# Altium PCB SignalAnalyse.PcbDoc (part 3 of 3)
Units mil, origin at the board's own origin, x right, y up, seen from the top; angles counter-clockwise.
Board outline 4204.03 x 1800 mil, 2 copper layers (Top Layer, Bottom Layer); 94 components, 52 nets, 372 pads, 56 vias.
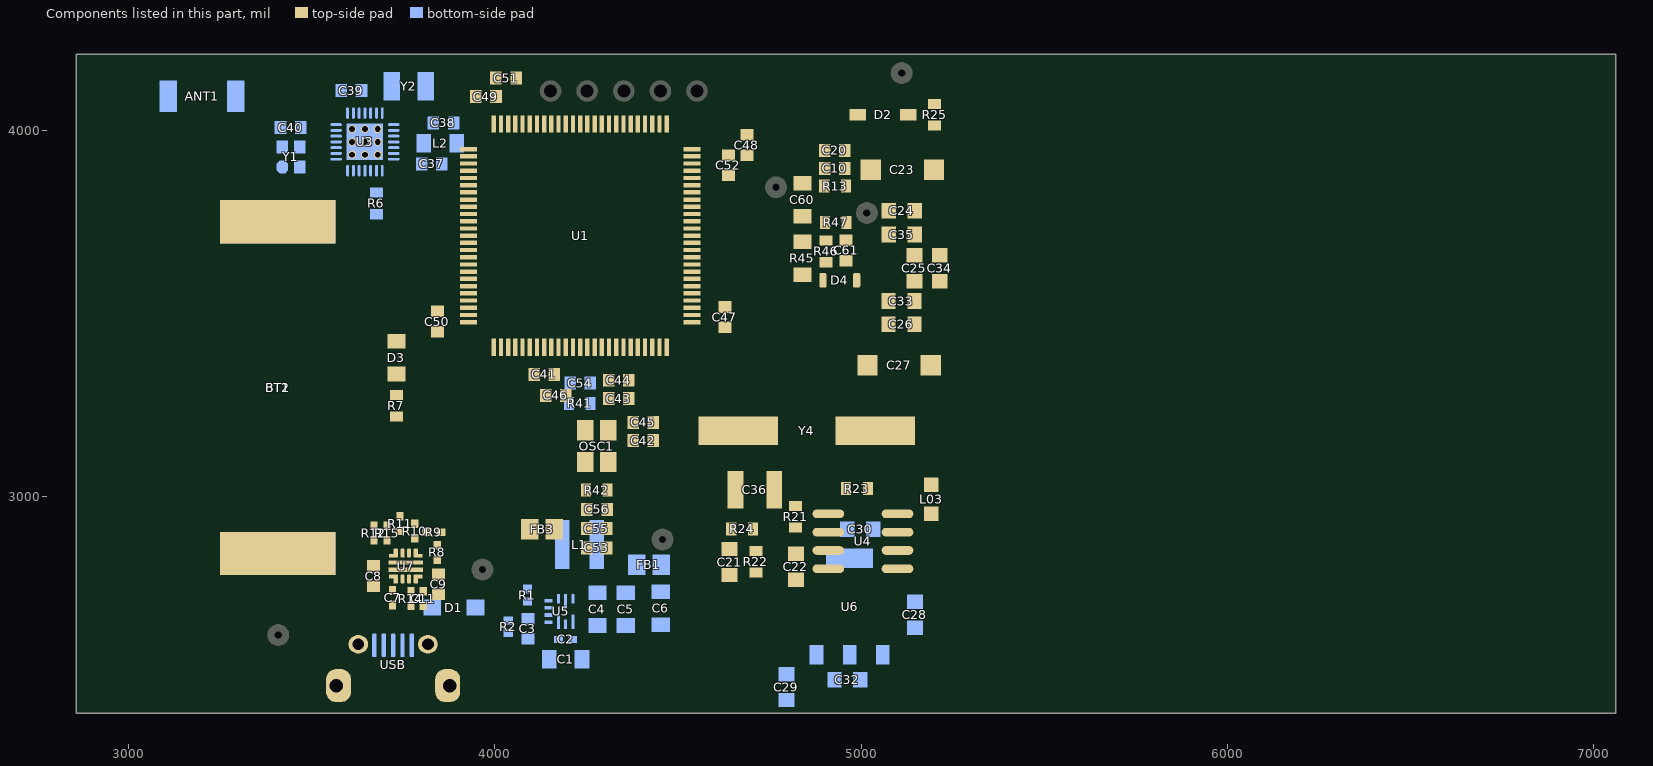
[diagram p2: the components of this part, seen from the top]

## Polygon pours and split planes (outlines as drawn) (continued)
no net on Top Layer "Top Layer-NetR23_1" (solid, pour order 92): 4907,3049
NetC22_2 on Top Layer "Top Layer-NetC22_2" (solid, pour order 90): 4854,2840 ccw(c4854,2830) 4844,2830 4844,2825 cw(c4841,2825) 4841,2822 4804,2822 cw(c4804,2827) 4799,2827 4799,2860 cw(c4803,2860) 4803,2864 4945.86,2864 ccw(c4945.86,2898.14) 4970,2874 ccw(c4950.69,2893.31) 4978,2893.31 4978,2953 ccw(c4944.2,2953) 4968.1,2976.9 4960,2985 ccw(c4947.93,2972.93) 4947.93,2990 4940,2990 cw(c4940,2999) 4931,2999 4931,3042 cw(c4934,3042) 4934,3045 4969,3045 cw(c4969,3033) 4981,3033 4981,3016 ccw(c5038.94,3016) 4997.97,2975.03 4998,2975 cw(c4971.44,2948.44) 5009,2948.44 5009,2881.97 cw(c4968.03,2881.97) 4997,2853 cw(c4965.62,2884.38) 4965.62,2840
NetR23_2 on Top Layer "Top Layer-NetR23_1 1" (solid, pour order 88): 5045,3126 cw(c5057,3126) 5057,3138 5143,3138 ccw(c5143,3147) 5152,3147 5152,3211 ccw(c5142,3211) 5142,3221 4937,3221 ccw(c4937,3211) 4927,3211 4927,3148 ccw(c4940,3148) 4940,3135 4995,3135 cw(c4995,3126) 5004,3126 5004,3005.66 ccw(c5031.31,3005.66) 5012,2986.34 cw(c4980.62,2954.96) 5025,2954.96 5025,2902.34 ccw(c5037,2902.34) 5037,2890.34 5080,2890.34 ccw(c5080,2898.34) 5088,2898.34 5088,2908.34 ccw(c5082,2908.34) 5082,2914.34 5061,2914.34 5058.66,2914.34 cw(c5058.66,2928) 5045,2928
no net on Top Layer "Top Layer-No Net 1" (solid, pour order 84): 5083,3597
GND on Top Layer "GND_L01_P024" (solid, remove dead copper, pour order 24): 4634,2568 ccw(c4634,2580) 4646,2580 4646,2639 ccw(c4630,2639) 4630,2655 4407,2655 cw(c4407,2667) 4395,2667 4395,3216 ccw(c4389,3216) 4389,3222 4332,3222 cw(c4332,3227) 4327,3227 4327,3334 ccw(c4322,3334) 4322,3339 4290,3339 ccw(c4290,3335) 4286,3335 4286,3155 ccw(c4291,3155) 4291,3150 4356,3150 cw(c4356,3145) 4361,3145 4361,2989 cw(c4355,2989) 4355,2983 4292,2983 ccw(c4292,2980) 4289,2980 4289,2782 cw(c4271,2782) 4271,2764 4066,2764 cw(c4066,2775) 4055,2775 4041,2775 4041,2725.42 ccw(c4141,2725.42) 4070.29,2654.71 4127.71,2597.29 ccw(c4198.42,2668) 4198.42,2568
3.3V on Top Layer "3.3V_L01_P072" (solid, remove dead copper, pour order 72): 4706,3971 4579,3971 ccw(c4579,3954) 4562,3954 4562,3943 cw(c4561,3943) 4561,3942 4495,3942 ccw(c4495,3936) 4489,3936 cw(c4481,3936) 4481,3928 4473,3928 cw(c4473,3943) 4458,3943 4458,3957 cw(c4470,3957) 4470,3969 4506,3969 ccw(c4506,3983) 4520,3983 cw(c4540,3983) 4540,4003 4706,4003
NetC51_2 on Top Layer "NETC51_2_L01_P010" (solid, remove dead copper, pour order 10): 4030,3992 4040,3992 ccw(c4040,3994) 4042,3994 4042,4121 cw(c4045,4121) 4045,4124 4074,4124 ccw(c4074,4125) 4075,4125 4075,4160 ccw(c4073,4160) 4073,4162 4030,4162
3.3V on Top Layer "3.3V_L01_P018" (solid, pour order 18): 4284,3122
3.3V on Top Layer "3.3V_L01_P016" (solid, pour order 16): 4284,3122
no net on Top Layer "Top Layer-No Net" (solid, pour order 0): 4557,3206
Vcc_un on Bottom Layer "Bottom Layer-Vcc_un_RF" (solid, pour order 110): 4902,2663.27 ccw(c4871.27,2663.27) 4893,2685 ccw(c4861.62,2653.62) 4861.62,2698 4704,2698 ccw(c4704,2682) 4688,2682 4688,2506 ccw(c4707,2506) 4707,2487 4898.41,2487 cw(c4898.5,2482.35) 4903.15,2482.44 ccw(c4911,2484) 4911,2476 4944,2476 ccw(c4944,2483) 4951,2483 4951,2514 ccw(c4940,2514) 4940,2525 4921,2525 cw(c4921,2544) 4902,2544
Vcc_un on Bottom Layer "VCC_UN_L02_P204" (solid, pour order 204): 3994.69,2771.69 ccw(c4039.8,2726.57) 3976,2726.57 3976,2591.38 cw(c3931.62,2591.38) 3963,2560 3933,2560 3925.29,2567.71 cw(c3996,2638.42) 3896,2638.42 3896,2744 ccw(c3856,2744) 3856,2784 3777.94,2784 cw(c3777.94,2865.94) 3720,2808 3683.29,2844.71 cw(c3754,2915.42) 3654,2915.42 3654,2966 cw(c3670,2966) 3670,2982 3672,2982 cw(c3672,2967) 3687,2967 3687,2922.42 ccw(c3787,2922.42) 3716.29,2851.71 ccw(c3766.29,2901.71) 3766.29,2831 3974,2831 cw(c3974,2799) 4006,2799 cw(c3967.38,2799)
GND on Bottom Layer "Bottom Layer-GND 3" (solid, pour order 186): 3625,4194 3352,4194 ccw(c3352,4190) 3348,4190 3348,4150 ccw(c3355,4150) 3355,4143 3423.58,4143 cw(c3423.58,4043) 3494.29,4113.71 3581,4027 3586,4032 3571.75,4046.25 cw(c3631.5,4106) 3547,4106 3547,4168 cw(c3557,4168) 3557,4178 3601,4178 cw(c3601,4170) 3609,4170 3609,4164 ccw(c3617.71,4163.16) 3625,4168
GND on Bottom Layer "Bottom Layer-GND 5" (solid, pour order 184): 3358,3880 cw(c3358,3890) 3348,3890 3348,4034 cw(c3352,4034) 3352,4038 3409.69,4038 cw(c3409.69,4010.69) 3429,4030 cw(c3416.93,4017.93) 3434,4017.93 3434,3994 cw(c3425,3994) 3425,3985 3391,3985 ccw(c3391,3978) 3384,3978 3384,3889 cw(c3375,3889) 3375,3880
GND on Bottom Layer "Bottom Layer-GND 4" (solid, pour order 180): 4177.97,4065.97 4162.14,4050.14 ccw(c4196.28,4016) 4148,4016 4148,3299 ccw(c4157,3299) 4157,3290 4224,3290 4224,3853.79 ccw(c4172.79,3853.79) 4209,3890 cw(c4252.46,3933.46) 4191.3,3927.43 4191.3,3972.99 cw(c4221.01,3972.99) 4200,3994 ccw(c4173.44,4020.56) 4211,4020.56 4211,4106.5 ccw(c4208,4106.5) 4208,4109.5 4196,4109.5 cw(c4134.44,4109.5)
BT_RXD on Bottom Layer "Bottom Layer-BT_RXD" (solid, pour order 176): 3556,3853 cw(c3556,3862) 3547,3862 3547,3920 cw(c3552.4,3920) 3552.4,3925.4 3577.4,3925.4 cw(c3577.4,3921.47) 3577.72,3925.39 cw(c3577.72,3921.11) 3582,3921.11 3582,3861 cw(c3574,3861) 3574,3853
BT_TXD on Bottom Layer "Bottom Layer-BT_TXD" (solid, pour order 178): 3591,3880 3591,3842 cw(c3585,3842) 3585,3836 ccw(c3585,3827) 3576,3827 3576,3819 ccw(c3583,3819) 3583,3812 3594,3812 ccw(c3594,3820) 3602,3820 3602,3901 ccw(c3598,3901) 3598,3905 3595,3905 ccw(c3595,3901) 3591,3901
3.3V on Bottom Layer "Bottom Layer-3.3V 1" (solid, pour order 158): 3780,3704.5 3780,3435 cw(c3749,3435) 3749,3404 3732,3404 cw(c3732,3439) 3697,3439 3697,3715 3697,3779 ccw(c3691,3779) 3691,3785 3662,3785 ccw(c3662,3778) 3655,3778 3655,3393 ccw(c3693,3393) 3693,3355 3756,3355 cw(c3756,3331) 3780,3331 3780,3227 ccw(c3813,3227) 3813,3194 4029,3194 cw(c4029,3178) 4045,3178 4045,3032 cw(c4002,3032) 4002,2989 3739,2989 ccw(c3739,2972) 3722,2972 ccw(c3741,2972) 3741,2953 4001,2953 cw(c4001,2909) 4045,2909 4045,2755 ccw(c4066,2755) 4066,2734 4091,2734 4105,2734 ccw(c4105,2745) 4116,2745 4116,2934 cw(c4131,2934) 4131,2949 4414,2949 cw(c4414,2935) 4428,2935 4428,2732 cw(c4420,2732) 4420,2724 ccw(c4420,2712) 4408,2712 4408,2707 ccw(c4426,2707) 4426,2689 4526,2689 ccw(c4526,2701) 4538,2701 4538,3000 4464,3000 4240,3000 4229,3000 cw(c4229,3011) 4218,3011 4218,3266 ccw(c4209,3266) 4209,3275 4151,3275 cw(c4151,3296) 4130,3296 4130,4005.64 cw(c4215.35,4005.65) 4155,4066 4169.98,4080.98 ccw(c4140.97,4109.99) 4182,4110 ccw(c4154,4110) 4154,4138 4031,4138 ccw(c4031,4120) 4013,4120 4013,3806 cw(c3998,3806) 3998,3791 3804,3791 ccw(c3804,3767) 3780,3767
BT_AT on Bottom Layer "Bottom Layer-BT_AT" (solid, pour order 156): 3722,3905 cw(c3722,3891) 3736,3891 3736,3851 cw(c3728,3851) 3728,3843 3722,3843 cw(c3722,3861.93) 3708.62,3848.54 3697.08,3860.08 cw(c3719,3882) 3688,3882 3688,3901 cw(c3692,3901) 3692,3905
VDD_A on Bottom Layer "Bottom Layer-VDD_A 1" (solid, pour order 154): 3602,4157 ccw(c3592,4157) 3592,4167 3570,4167 ccw(c3570,4159) 3562,4159 3562,4094 ccw(c3566,4094) 3566,4090 3589,4090 cw(c3589,4085) 3594,4085 3594,4034 ccw(c3597,4034) 3597,4031 ccw(c3597,4036) 3602,4036
3.3V on Bottom Layer "Bottom Layer-3.3V" (solid, pour order 152): 3818,3802 ccw(c3829,3802) 3829,3791 3830,3791 cw(c3830,3785) 3836,3785 3836,3775 cw(c3820,3775) 3820,3759 3780,3759 3780,3883.06 ccw(c3750.43,3883.06) 3771.34,3903.97 cw(c3799.73,3915.73) 3769,3915.73 3769,3928 ccw(c3749.69,3928) 3763.34,3941.66 3762,3943 3766.29,3947.29 cw(c3768,3945.59) 3768,3948 3772.05,3943.95 cw(c3760.1,3932) 3777,3932 ccw(c3783,3932) 3783,3926 3815,3926 cw(c3815,3923) 3818,3923 3818,3807
no net on Bottom Layer "Bottom Layer-No Net" (solid, pour order 150): 3816,3890
GND on Bottom Layer "Bottom Layer-GND 2" (solid, pour order 148): 3898.84,4168.16 cw(c3898.84,4157) 3910,4157 3910,4048 cw(c3901,4048) 3901,4039 3874,4039 ccw(c3874,4034) 3869,4034 3869,4007 ccw(c3875,4007) 3875,4001 3919,4001 cw(c3919,3992) 3928,3992 3928,3935 cw(c3920,3935) 3920,3927 3843,3927 ccw(c3843,3920) 3836,3920 3836,3848 ccw(c3844,3848) 3844,3840 3970,3840 ccw(c3970,3845) 3975,3845 3975,4186 ccw(c3967,4186) 3967,4194 3617,4194 ccw(c3617,4186) 3609,4186 3609,4030 cw(c3597,4030) 3597,4018 3597,4007 ccw(c3602,4007) 3602,4002 3634,4002 ccw(c3634,4011) 3643,4011 3643,4018 cw(c3643,4026) 3635,4026 3635,4085 cw(c3639,4085) 3639,4089 3650,4089 ccw(c3650,4094) 3655,4094 3655,4157 cw(c3666.16,4157) 3666.16,4168.16
NetU3_1 on Bottom Layer "Bottom Layer-NetU3_1" (solid, pour order 146): 3736,4011 ccw(c3736,4020) 3745,4020 3745,4154 ccw(c3739,4154) 3739,4160 3701,4160 ccw(c3701,4152) 3693,4152 3693,4087 ccw(c3700,4087) 3700,4080 cw(c3700,4072) 3708,4072 3708,4015 ccw(c3712,4015) 3712,4011
NetL2_2 on Bottom Layer "Bottom Layer-NetL2_2" (solid, pour order 142): 3720,3972 3773,3972 ccw(c3773,3985) 3786,3985 3809,3985 3809,3952 3786,3952 ccw(c3774,3952) 3774,3964 3720,3964
VDD_A on Bottom Layer "Bottom Layer-VDD_A" (solid, pour order 144): 3849,4035 cw(c3875,4035) 3875,4061 3876,4061 ccw(c3876,4080) 3895,4080 3895,4085 ccw(c3878,4085) 3878,4102 3874,4102 ccw(c3874,4083) 3855,4083 cw(c3852.59,4083) 3854.29,4081.29 3779,4006 3784,4000 cw(c3788.83,3995.17) 3788.83,4002 3828.1,4002 cw(c3828.1,3978.12) 3835.04,4000.97 3841.51,3994.5 cw(c3821.01,3974) 3850,3974 3850,3947 ccw(c3861,3947) 3861,3936 3911,3936 ccw(c3911,3943) 3918,3943 3918,3987 ccw(c3915,3987) 3915,3990 3875.61,3990 cw(c3875.61,4010.78) 3860.91,3996.09 3851.83,4005.17 cw(c3858.66,4012) 3849,4012
GND on Bottom Layer "Bottom Layer-GND" (solid, pour order 114): 4253,4158 ccw(c4253,4116) 4211,4116 4211,4097 cw(c4204.2,4096.8) 4204,4090 cw(c4203.77,4097.77) 4196,4098 4196,4121 ccw(c4159,4121) 4159,4158 3987,4158 ccw(c3987,4146) 3975,4146 3963,4146 3963,4194 4649,4194 cw(c4649,4174) 4669,4174 4669,2481 ccw(c4687,2481) 4687,2463 4969.75,2463 ccw(c4962,2477) 4978,2477 4978,2519 cw(c4983,2519) 4983,2524 5018,2524 ccw(c5018,2536) 5030,2536 5030,2593 cw(c5040,2593) 5040,2603 5105,2603 ccw(c5105,2616) 5118,2616 5118,2654 cw(c5130,2654) 5130,2666 5172,2666 ccw(c5172,2675) 5181,2675 5181,2739 ccw(c5175,2739) 5175,2745 5073,2745 cw(c5073,2761) 5057,2761 5057,2870 ccw(c5047,2870) 5047,2880 5025.66,2880 cw(c5025.65,2893.65) 5016,2884 5015.24,2884.76 cw(c5025.49,2895) 5011,2895 5011,2929 cw(c5015,2929) 5015,2933 5063.58,2933 cw(c5063.59,2833.02) 5134.29,2903.71 5214.56,2823.43 cw(c5182.16,2791.01) 5228,2791 5228,2480.14 cw(c5193.89,2480.13) 5218,2456 5214.29,2452.29 cw(c5143.59,2522.98) 5143.58,2423 3594.42,2423 cw(c3594.42,2522.99) 3523.71,2452.29 3277.29,2698.71 cw(c3348,2769.42) 3248,2769.42 3248,2903 3247,2896 cw(c3258,2896) 3258,2907 3557,2907 cw(c3557,2900) 3564,2900 3564,2656 ccw(c3587,2656) 3587,2633 3666,2633 cw(c3666,2622) 3677,2622 3677,2541 ccw(c3689,2541) 3689,2529 3775,2529 ccw(c3775,2543) 3789,2543 3789,2615 cw(c3798,2615) 3798,2624 3850,2624 cw(c3850,2611) 3863,2611 3863,2607 ccw(c3904.04,2607) 3875.02,2577.98 3945.71,2507.29 ccw(c4016.42,2578) 4016.42,2478 4155.96,2478 ccw(c4155.96,2536.04) 4197,2495 ccw(c4146.31,2545.69) 4218,2545.7 4218,2563 ccw(c4193.89,2563.01) 4210.93,2580.07 4205.24,2585.76 cw(c4215.49,2596) 4201,2596 4201,2612.93 ccw(c4183.96,2612.94) 4196,2625 4191.83,2629.17 cw(c4198.66,2636) 4189,2636 4189,2665 cw(c4202,2665) 4202,2678 4216.76,2678 cw(c4216.77,2667.78) 4224,2675 ccw(c4236.07,2687.08) 4236.07,2670 4563,2670 ccw(c4563,2685) 4578,2685 4578,3977 ccw(c4549,3977) 4549,4006 4532,4006 cw(c4532,4026) 4512,4026 4512,4143 ccw(c4497,4143) 4497,4158
VCC_5_RF on Bottom Layer "Bottom Layer-VCC_5_RF" (solid, pour order 112): 4964,3031 cw(c4964,3012) 4983,3012 4983,2870 ccw(c4991,2870) 4991,2862 5024,2862 cw(c5024,2851) 5035,2851 5035,2748 ccw(c5048,2748) 5048,2735 5166,2735 cw(c5166,2728) 5173,2728 5173,2699 cw(c5165,2699) 5165,2691 5024,2691 5006,2691 ccw(c5006,2676) 4991,2676 4991,2546 cw(c4984,2546) 4984,2539 4955,2539 cw(c4955,2549) 4945,2549 4945,2580 4945,2638.58 ccw(c4845.01,2638.58) 4915.71,2709.29 4911.36,2713.64 4880.29,2744.71 cw(c4951,2815.42) 4851,2815.42 4851,3023 cw(c4859,3023) 4859,3031
GND on Bottom Layer "Bottom Layer-GND 1" (solid, pour order 108): 4023,2610 ccw(c4032.66,2610) 4025.83,2603.17 4028,2601 ccw(c4044.9,2617.9) 4044.9,2594 4106.62,2594 ccw(c4106.62,2638.38) 4138,2607 ccw(c4125.93,2619.07) 4143,2619.07 4143,2638 cw(c4152,2638) 4152,2647 4153,2647 ccw(c4153,2652) 4158,2652 4158,2660 ccw(c4155,2660) 4155,2663 4135,2663 ccw(c4135,2659) 4131,2659 4131,2654 cw(c4116,2654) 4116,2639 4023,2639
FB on Bottom Layer "Bottom Layer-FB" (solid, pour order 106): 4023,2653 4023,2671.51 cw(c4043.49,2671.51) 4029,2686 4059.81,2716.81 cw(c4082,2694.62) 4082,2726 4099,2726 cw(c4099,2719) 4106,2719 4106,2705 ccw(c4110,2705) 4110,2701 4156,2701 cw(c4156,2698) 4159,2698 4159,2692 cw(c4157,2692) 4157,2690 4072.9,2690 ccw(c4072.9,2666.1) 4056,2683 ccw(c4072.9,2666.1) 4049,2666.1 4049,2653
NetC4_2 on Bottom Layer "Bottom Layer-NetC4_2" (solid, pour order 104): 4257,2935 4257,2764 cw(c4246,2764) 4246,2753 4219,2753 ccw(c4219,2742) 4208,2742 4208,2710 ccw(c4214,2710) 4214,2704 4370,2704 ccw(c4370,2718) 4384,2718 4384,2768 cw(c4398,2768) 4398,2782 4409,2782 ccw(c4409,2788) 4415,2788 4415,2836 ccw(c4406,2836) 4406,2845 4310,2845 cw(c4310,2856) 4299,2856 4299,2935
3.3V on Bottom Layer "3.3V_L02_P070" (solid, remove dead copper, pour order 70): 4489,3701 ccw(c4457.62,3701) 4479.81,3723.19 4456,3747 cw(c4475.31,3766.31) 4448,3766.31 4448,3960 cw(c4467,3960) 4467,3979 4520,3979 cw(c4520,3961) 4538,3961 4538,2967 4301,2967 cw(c4301,2978) 4290,2978 4290,2989 cw(c4301,2989) 4301,3000 ccw(c4301,3014) 4315,3014 4315,3530 cw(c4345,3530) 4345,3560 4465,3560 ccw(c4465,3584) 4489,3584

## Keep-outs
Keep-Out Layer:
  the board outline again, w10

## Other copper
Top Layer:
  region net NetD3_1: 3758,3262 3758,3355 3705,3355 3705,3262
  rectangle net NetC21_2: 4619,2835 4664,2934
  region net NetOSC1_1: 4336,2998 4336,3124 4286,3124 4286,2998
  region net B\T\_\R\S\T\: 3559.41,3833.65
Bottom Layer:
  rectangle net ANT: 3268.26,4049.39 3347,4137
  rectangle: 2974.52,4049.39 3132,4137
  rectangle net Vcc_un: 4135,2710 4177,2733

## Silkscreen, mask and mechanical layers (free items; w line width, h text height)
Top Overlay:
  text "3V3" at 4091,4148 h36
  text "TMS" at 4207,4148 h36
  text "TCK" at 4319,4148 h36
  text "RST" at 4435,4148 h36
  text "GND" at 4551,4148 h36
  text "Vin+" at 4957,4147 h30
  text "RFID" at 4717,3790 h30 r90
  text "-" at 3248,3616 h60
  text "Stanford" at 5956,3297 h50
  text "5V" at 4809,3029 h30
  text "VCC" at 3928,2847 h30
  text "3V3" at 4415,2797 h30
  text "+" at 3271,2652 h60
  text "GND" at 3371,2533 h30
Bottom Overlay:
  lines w10: 3228.5,4075 3253.5,4075 3253.5,4112 3228.5,4112 3228.5,4075
  text "." at 3390,3853 h60
  text "+" at 3288,3616 h60
  text "-" at 3312,2652 h60

## Text inside footprints (layer, text, board x,y; h text height)
D1: Bottom Overlay "+" at 3803,2706 h48
D2: Top Overlay "+" at 5130.1,4062 h48
U1: Multi-Layer "Copyright (C) 2016 Accelerated Designs. All rights reserved" at 4233,3712 h1 r90
U5: Bottom Overlay "*" at 4163.12,2765.5 h50 r90; Mechanical 13 "*" at 4188.38,2709.5 h50 r90
U7: Top Overlay "*" at 3794,2878 h30 r270; Mechanical 13 "*" at 3766.98,2843.54 h50 r270